# EAGLE board Oscar_s first board (EAGLE 8.2.1)

No outline drawn. Coordinates in mm, seen from the top.
Copper layers (1*16): Top 0.035mm / dielectric 1.5mm / Bottom 0.035mm
Design rules "default": minimum track width 6mil, minimum drill 0.35mm, track to track 6mil, track to pad 6mil, pad to pad 6mil, via to via 6mil, smd to smd 6mil, copper to edge 40mil, drill to drill 6mil, minimum pad ring 10mil, minimum via ring 8mil, stop-mask expansion 4mil, vias tented up to drill 0mil, thermal gap 10mil

## Footprints (pad centres in the part's own frame; a part is rotated, then mirrored left to right if it is on the bottom)
DIP28 = drill 1.016 long: 1 -16.51,-3.81; 2 -13.97,-3.81; 3 -11.43,-3.81; 4 -8.89,-3.81; 5 -6.35,-3.81; 6 -3.81,-3.81; 7 -1.27,-3.81; 8 1.27,-3.81; 9 3.81,-3.81; 10 6.35,-3.81; 11 8.89,-3.81; 12 11.43,-3.81; 13 13.97,-3.81; 14 16.51,-3.81; 15 16.51,3.81; 16 13.97,3.81; 17 11.43,3.81; 18 8.89,3.81; 19 6.35,3.81; 20 3.81,3.81; 21 1.27,3.81; 22 -1.27,3.81; 23 -3.81,3.81; 24 -6.35,3.81; 25 -8.89,3.81; 26 -11.43,3.81; 27 -13.97,3.81; 28 -16.51,3.81
CAP-PTH-10MM = drill 1.016 long: 1 -5,0; 2 5,0
TACTILE_SWITCH_PTH_6.0MM = drill 1.016 long: 1 -3.251,2.261; 2 3.251,2.261; 3 -3.251,-2.261; 4 3.251,-2.261
RESONATOR-PTH-7.6X3.8 = drill 1.016 long: 1 -2.54,0; 2 0,0; 3 2.54,0
AXIAL-0.3 = drill 1.016 long: P$1 -3.81,0; P$2 3.81,0
USB = drill 1.016 long: 1 -15.24,7.62; 2 -12.7,7.62; 3 -10.16,7.62; 4 -7.62,7.62; 5 -5.08,7.62

## Placement (x,y rotation side)
E$1  [DIP28]  55.88,39.37 270 top
E$2  [CAP-PTH-10MM]  34.29,22.86 90 top
E$3  [TACTILE_SWITCH_PTH_6.0MM]  35.56,53.34 0 top
E$4  [RESONATOR-PTH-7.6X3.8]  34.29,39.37 90 top
E$5  [AXIAL-0.3]  45.72,64.77 90 top
E$6  [USB]  74.93,15.24 270 top

## Library data of the parts
E$1-E$6 = Oscar's library